# EAGLE board IRTransmitterTwig (EAGLE 5.11)
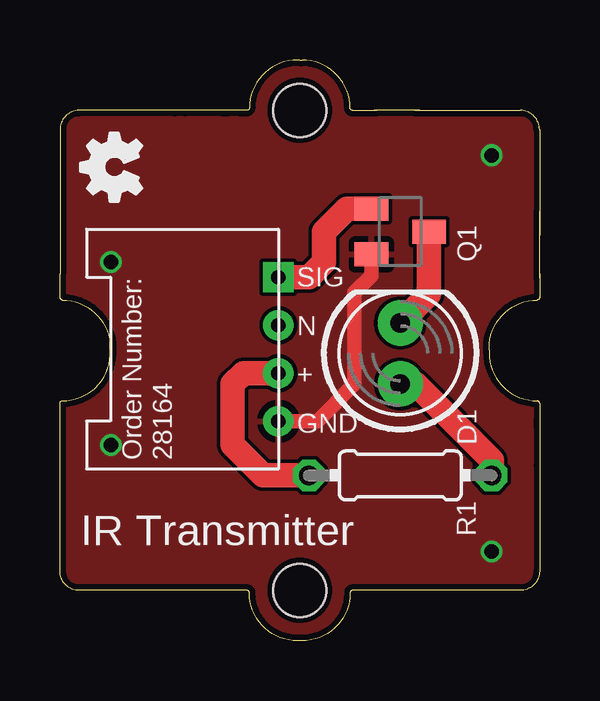
[diagram p0: board, top side]
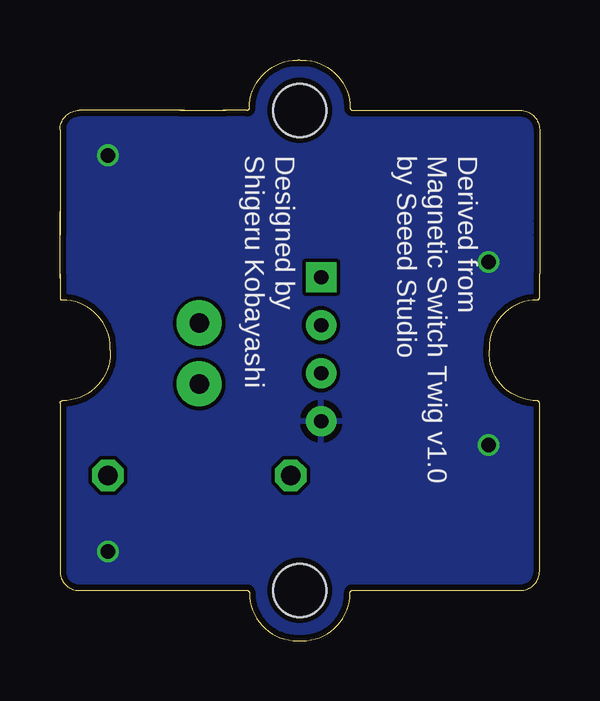
[diagram p1: board, bottom side, seen from below]

Size 20 x 24.2 mm. Coordinates in mm from the lower left corner, seen from the top.
Copper layers (1*16): Top 0.035mm / dielectric 1.5mm / Bottom 0.035mm
Design rules "SeeedStudio_rule_no_angle_090911": minimum track width 6mil, minimum drill 12mil, track to track 6mil, track to pad 6mil, pad to pad 6mil, via to via 6mil, smd to smd 0mil, copper to edge 10mil, drill to drill 10mil, minimum pad ring 10mil, minimum via ring 6mil, stop-mask expansion 2mil, vias tented up to drill 100mil, thermal gap 10mil

## Footprints (pad centres in the part's own frame; a part is rotated, then mirrored left to right if it is on the bottom)
LED5MM = drill 0.813 pad 1.88 round: A -1.27,0; K 1.27,0
SC59 = smd 1 x 1.4: B -0.95,-1.2; C 0,1.2; E 0.95,-1.2
0204/7 = drill 0.813 octagon: 1 -3.81,0; 2 3.81,0
U1N = hole 2.2: 0,-10; 0,10
TWIG-4PIN-L = drill 0.6 pad 1.27 square: D1 0,0 | drill 0.6 pad 1.27 round: D2 0,-2; GND 0,-6; VCC 0,-4

## Placement (x,y rotation side)
D1  [LED5MM]  14.19,11.97 90 top
LOGO1  OSHW_LOGO_FILLX0100-NT  [OSHW_FILLX100_NOTEXT]  3.4,18.32 90 top
Q1  DTA114WKAT146  [SC59]  14.19,17.05 270 top
R1  [0204/7]  14.19,6.89 180 top
TWIG2  U1N  [U1N]  10,12.1 180 top
U$1  TWIG-4PIN  [TWIG-4PIN-L]  9.11,15.15 0 top

## Library data of the parts
D1 = SparkFun
LOGO1 = OSHW
Q1 = transistor-small-signal
R1 = rcl
TWIG2 = twig_template1
U$1 = kotobuki

## Nets
GND: Q1.E U$1.GND
N$1: Q1.B U$1.D1
N$3: D1.K Q1.C
N$4: D1.A R1.1
N$5: R1.2 U$1.VCC

## Tracks (layer width: path | path; a pad name or v marks a point on that pad's centre or on a via)
GND  (via drill 0.6)
  Top 0.61: Q1.E 12.99,15.22 12.29,14.51 12.29,10.7 10.73,9.15 U$1.GND
  other vias: 18,20.23 18,3.72 2.13,15.78 2.13,8.16
  pour Top: -0.41,24.67 21.18,24.67 21.18,-0.73 -0.41,-0.73
  pour Bottom: -1.68,25.94 22.45,25.94 22.45,-2 -1.68,-2
N$1
  Top 1.016: Q1.B 11.97,18 11.02,17.05 11.02,15.78 10.38,15.15 U$1.D1
N$3
  Top 1.016: Q1.C 15.39,14.44 D1.K
N$4
  Top 1.016: D1.A 14.83,10.7 18,7.53 R1.1
N$5
  Top 1.016: R1.2 8.48,6.89 7.21,8.16 7.21,10.7 7.65,11.15 U$1.VCC

## Text on the board
tPlace: SIG | N | + | GND | Order Number: | 28164 | IR Transmitter
bNames: Derived from | Magnetic Switch Twig v1.0 | by Seeed Studio | Designed by | Shigeru Kobayashi
tValues: 1/2W